# EAGLE board Particle2NodeMCU - Panel (EAGLE 7.3.0)
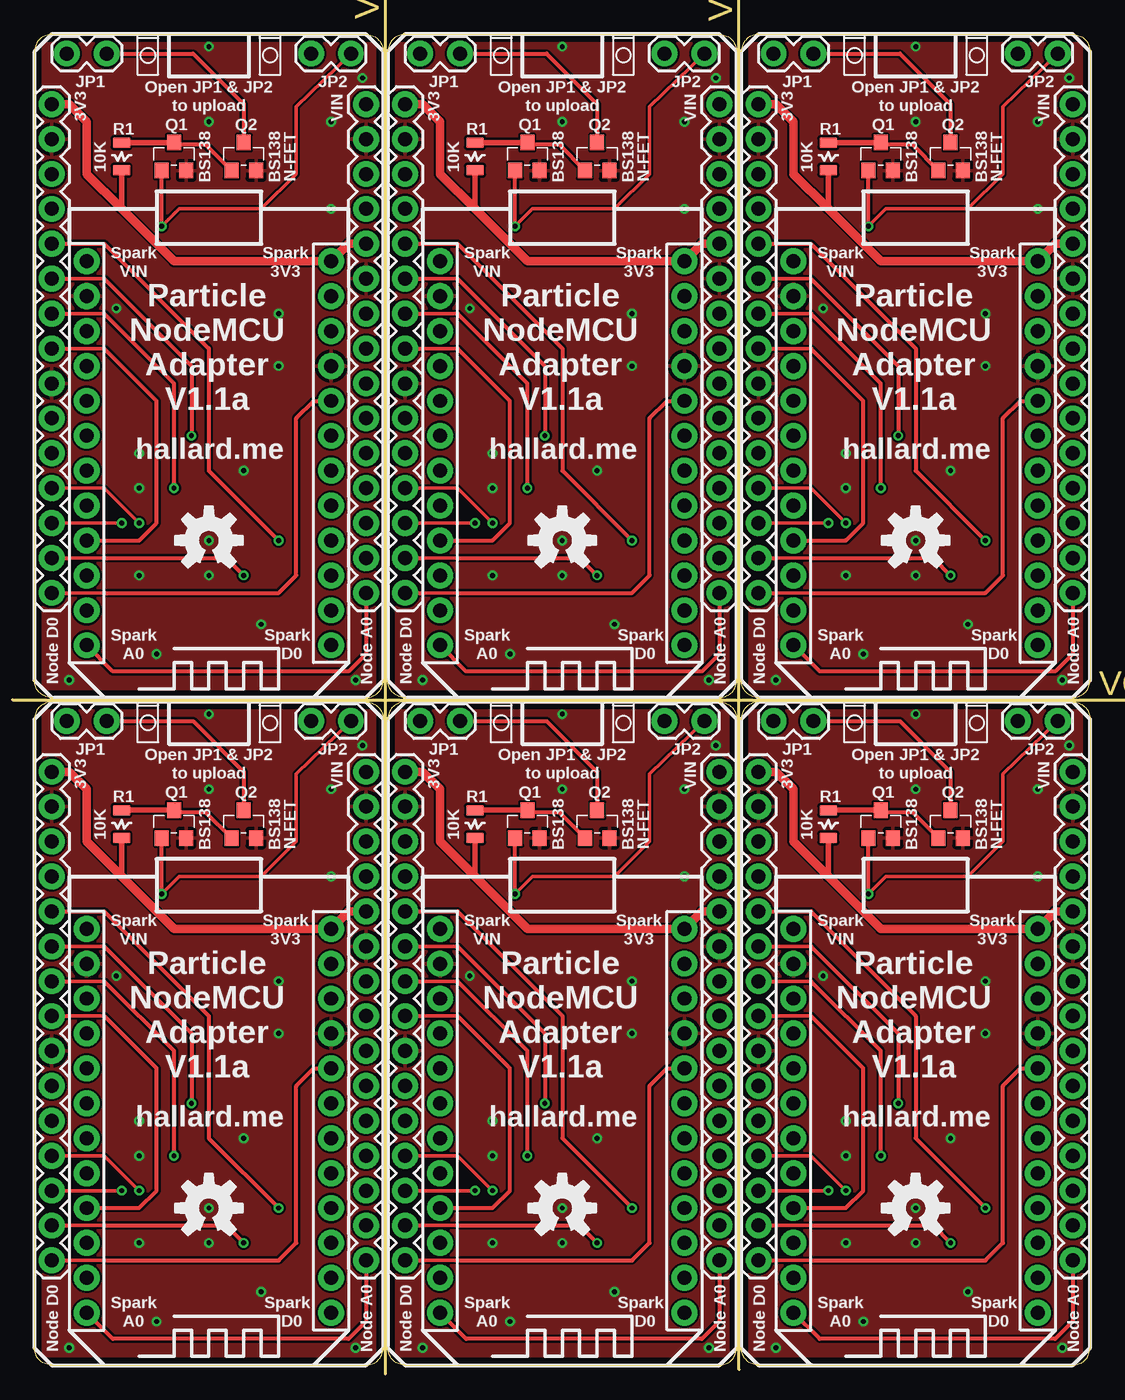
[diagram p0: board, top side]
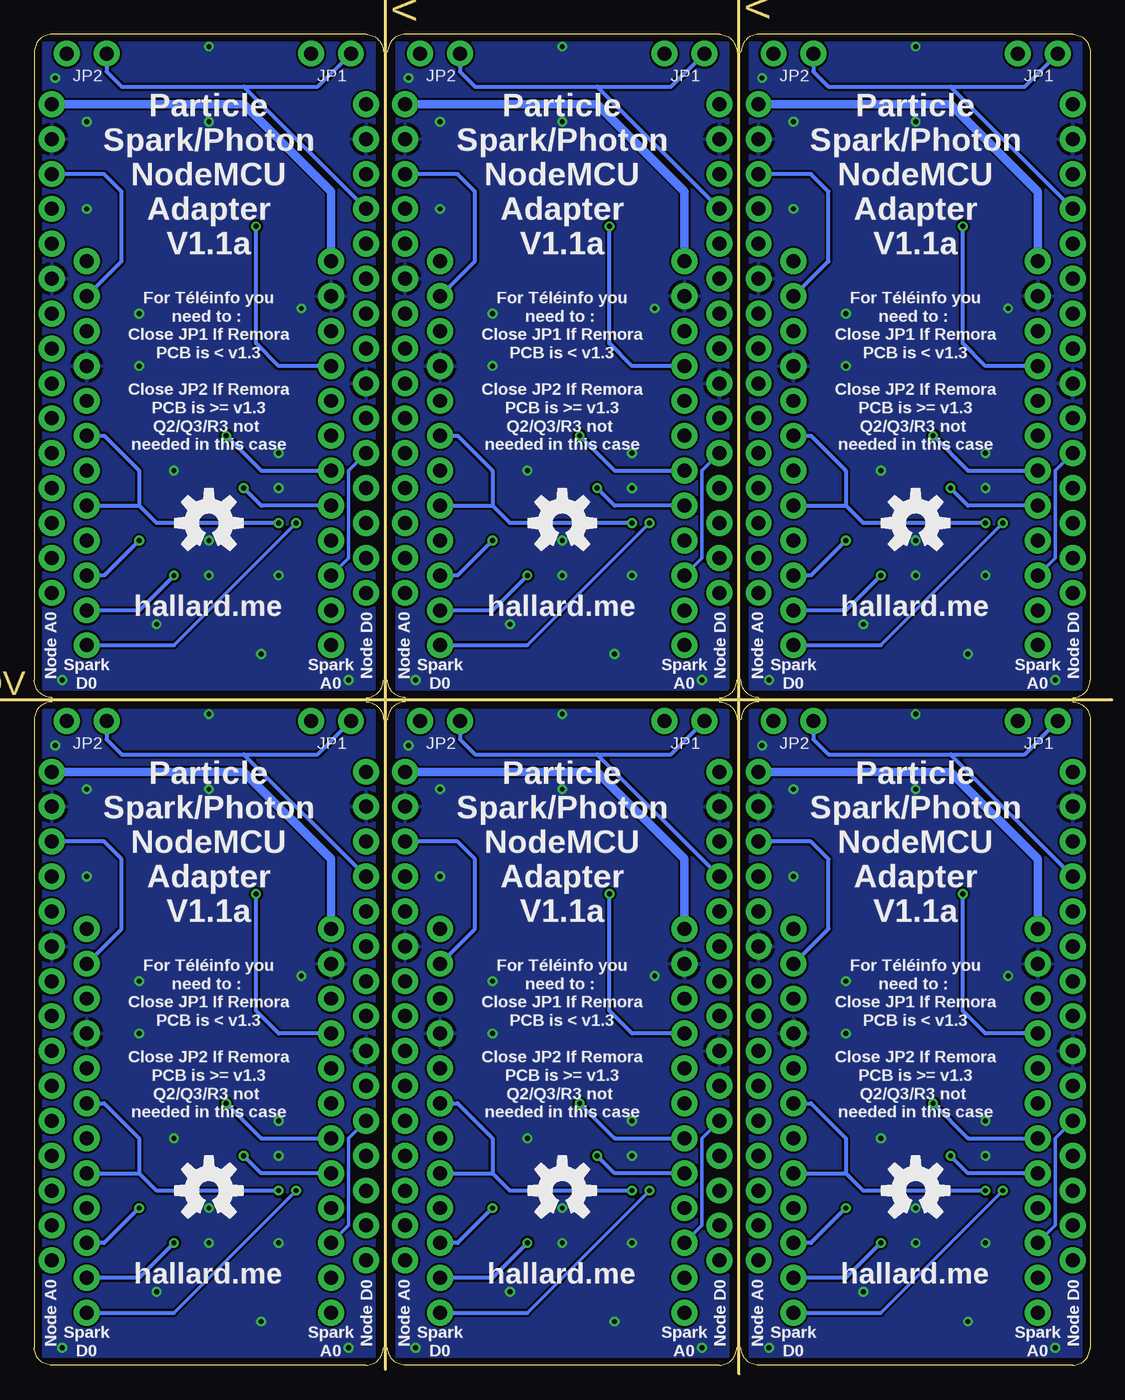
[diagram p1: board, bottom side, seen from below]

Size 76.83 x 96.84 mm. Coordinates in mm from the lower left corner, seen from the top.
Outline: 1.27,0 24.13,0 arc90 25.4,1.27 25.72,1.27 arc90 26.99,0 49.85,0 arc90 51.12,1.27 51.44,1.27 arc90 52.7,0 75.56,0 arc90 76.83,1.27 76.83,46.99 arc90 75.56,48.26 75.56,48.58 arc90 76.83,49.85 76.83,95.57 arc90 75.56,96.84 52.7,96.84 arc90 51.44,95.57 51.12,95.57 arc90 49.85,96.84 26.99,96.84 arc90 25.72,95.57 25.4,95.57 arc90 24.13,96.84 1.27,96.84 arc90 0,95.57 0,49.85 arc90 1.27,48.58 1.27,48.26 arc90 0,46.99 0,1.27 arc90 1.27,0
Outline: 24.13,48.26 arc-90 25.4,46.99 25.72,46.99 arc-90 26.99,48.26 26.99,48.58 arc-90 25.72,49.85 25.4,49.85 arc-90 24.13,48.58 24.13,48.26
Outline: 49.85,48.26 arc-90 51.12,46.99 51.44,46.99 arc-90 52.7,48.26 52.7,48.58 arc-90 51.44,49.85 51.12,49.85 arc-90 49.85,48.58 49.85,48.26
Copper layers (1*16): Top 0.035mm / dielectric 1.5mm / Bottom 0.035mm
Design rules "SeeedStudio_2layer_DRU_no_angle_20140221": minimum track width 6mil, minimum drill 12mil, track to track 6mil, track to pad 6mil, pad to pad 6mil, via to via 6mil, smd to smd 0mil, copper to edge 10mil, drill to drill 10mil, minimum pad ring 10mil, minimum via ring 6mil, stop-mask expansion 2mil, vias tented up to drill 100mil, thermal gap 10mil
Milling: 3 lines

## Footprints (pad centres in the part's own frame; a part is rotated, then mirrored left to right if it is on the bottom)
1X02_LOCK = drill 1.016 pad 1.88: 1 -0.178,0; 2 2.718,0
1X15 = drill 1.016 pad 1.88: 1 0,0; 2 2.54,0; 3 5.08,0; 4 7.62,0; 5 10.16,0; 6 12.7,0; 7 15.24,0; 8 17.78,0; 9 20.32,0; 10 22.86,0; 11 25.4,0; 12 27.94,0; 13 30.48,0; 14 33.02,0; 15 35.56,0
SOT23 = smd 1.016 x 1.143: 1 -0.889,-1.016; 2 0.889,-1.016; 3 0,1.016
0805-RES = smd 0.8 x 1.3: 1 -1,0; 2 1,0
SPARK_CORE = drill 1.016 pad 1.88: 1 -8.89,13.97; 2 -8.89,11.43; 3 -8.89,8.89; 4 -8.89,6.35; 5 -8.89,3.81; 6 -8.89,1.27; 7 -8.89,-1.27; 8 -8.89,-3.81; 9 -8.89,-6.35; 10 -8.89,-8.89; 11 -8.89,-11.43; 12 -8.89,-13.97; 13 8.89,-13.97; 14 8.89,-11.43; 15 8.89,-8.89; 16 8.89,-6.35; 17 8.89,-3.81; 18 8.89,-1.27; 19 8.89,1.27; 20 8.89,3.81; 21 8.89,6.35; 22 8.89,8.89; 23 8.89,11.43; 24 8.89,13.97

## Placement (x,y rotation side)
JP1  [1X02_LOCK]  2.54,46.86 0 top
JP2  [1X02_LOCK]  22.86,46.86 180 top
JP3  [1X15]  1.27,7.62 90 top
JP4  [1X15]  24.13,7.62 90 top
JP5  [1X02_LOCK]  28.26,46.86 0 top
JP6  [1X15]  49.85,7.62 90 top
JP7  [1X15]  26.99,7.62 90 top
JP8  [1X02_LOCK]  48.58,46.86 180 top
JP9  [1X02_LOCK]  53.98,46.86 0 top
JP10  [1X15]  75.56,7.62 90 top
JP11  [1X15]  52.7,7.62 90 top
JP12  [1X02_LOCK]  74.3,46.86 180 top
JP13  [1X02_LOCK]  2.54,95.44 0 top
JP14  [1X15]  24.13,56.2 90 top
JP15  [1X15]  1.27,56.2 90 top
JP16  [1X02_LOCK]  22.86,95.44 180 top
JP17  [1X02_LOCK]  28.26,95.44 0 top
JP18  [1X15]  49.85,56.2 90 top
JP19  [1X15]  26.99,56.2 90 top
JP20  [1X02_LOCK]  48.58,95.44 180 top
JP21  [1X02_LOCK]  53.98,95.44 0 top
JP22  [1X15]  75.56,56.2 90 top
JP23  [1X15]  52.7,56.2 90 top
JP24  [1X02_LOCK]  74.3,95.44 180 top
LOGO1  OSHW-LOGOM  [OSHW-LOGO-M]  12.7,11.43 0 top
LOGO2  OSHW-LOGOM  [OSHW-LOGO-M]  12.7,12.7 0 bottom
LOGO3  OSHW-LOGOM  [OSHW-LOGO-M]  38.42,11.43 0 top
LOGO4  OSHW-LOGOM  [OSHW-LOGO-M]  64.14,11.43 0 top
LOGO5  OSHW-LOGOM  [OSHW-LOGO-M]  12.7,60.01 0 top
LOGO6  OSHW-LOGOM  [OSHW-LOGO-M]  38.42,60.01 0 top
LOGO7  OSHW-LOGOM  [OSHW-LOGO-M]  64.14,60.01 0 top
LOGO8  OSHW-LOGOM  [OSHW-LOGO-M]  38.42,12.7 0 bottom
LOGO9  OSHW-LOGOM  [OSHW-LOGO-M]  64.14,12.7 0 bottom
LOGO10  OSHW-LOGOM  [OSHW-LOGO-M]  12.7,61.28 0 bottom
LOGO11  OSHW-LOGOM  [OSHW-LOGO-M]  38.42,61.28 0 bottom
LOGO12  OSHW-LOGOM  [OSHW-LOGO-M]  64.14,61.28 0 bottom
Q1  MOSFET-N  [SOT23]  10.16,39.37 0 top
Q2  MOSFET-N  [SOT23]  15.24,39.37 0 top
Q3  MOSFET-N  [SOT23]  35.88,39.37 0 top
Q4  MOSFET-N  [SOT23]  40.96,39.37 0 top
Q5  MOSFET-N  [SOT23]  61.59,39.37 0 top
Q6  MOSFET-N  [SOT23]  66.67,39.37 0 top
Q7  MOSFET-N  [SOT23]  10.16,87.95 0 top
Q8  MOSFET-N  [SOT23]  15.24,87.95 0 top
Q9  MOSFET-N  [SOT23]  35.88,87.95 0 top
Q10  MOSFET-N  [SOT23]  40.96,87.95 0 top
Q11  MOSFET-N  [SOT23]  61.59,87.95 0 top
Q12  MOSFET-N  [SOT23]  66.67,87.95 0 top
R1  10K  [0805-RES]  6.35,39.37 270 top
R2  10K  [0805-RES]  32.07,39.37 270 top
R3  10K  [0805-RES]  57.78,39.37 270 top
R4  10K  [0805-RES]  6.35,87.95 270 top
R5  10K  [0805-RES]  32.07,87.95 270 top
R6  10K  [0805-RES]  57.78,87.95 270 top
U$1  SPARK_CORECORE  [SPARK_CORE]  38.42,17.78 0 top
U$2  SPARK_CORECORE  [SPARK_CORE]  12.7,17.78 0 top
U$3  SPARK_CORECORE  [SPARK_CORE]  64.14,17.78 0 top
U$4  SPARK_CORECORE  [SPARK_CORE]  12.7,66.36 0 top
U$5  SPARK_CORECORE  [SPARK_CORE]  38.42,66.36 0 top
U$6  SPARK_CORECORE  [SPARK_CORE]  64.14,66.36 0 top

## Library data of the parts
JP1-JP24 = SparkFun-Connectors
LOGO1-LOGO12 = SparkFun-Aesthetics
Q1-Q12 = Seeed-Discrete
R1-R6 = _c2h
U$1-U$6 = Spark

## Nets
3V1: JP6.11 JP7.15 R2.2 U$1.24
3V2: JP10.11 JP11.15 R3.2 U$3.24
3V3: JP3.15 JP4.11 R1.2 U$2.24
3V3*: U$2.22
3V3*1: U$1.22
3V3*2: U$3.22
3V3*3: U$4.22
3V3*4: U$5.22
3V3*5: U$6.22
3V4: JP14.11 JP15.15 R4.2 U$4.24
3V5: JP18.11 JP19.15 R5.2 U$5.24
3V6: JP22.11 JP23.15 R6.2 U$6.24
A0: JP4.1 U$2.12
A1: JP6.1 U$1.12
A2: JP10.1 U$3.12
A3: JP14.1 U$4.12
A4: JP18.1 U$5.12
A5: JP22.1 U$6.12
GND: JP3.7 JP3.14 JP4.10 JP4.14 Q1.2 Q2.2 U$2.2 U$2.21
GND1: JP6.10 JP6.14 JP7.7 JP7.14 Q3.2 Q4.2 U$1.2 U$1.21
GND2: JP10.10 JP10.14 JP11.7 JP11.14 Q5.2 Q6.2 U$3.2 U$3.21
GND3: JP14.10 JP14.14 JP15.7 JP15.14 Q7.2 Q8.2 U$4.2 U$4.21
GND4: JP18.10 JP18.14 JP19.7 JP19.14 Q9.2 Q10.2 U$5.2 U$5.21
GND5: JP22.10 JP22.14 JP23.7 JP23.14 Q11.2 Q12.2 U$6.2 U$6.21
GPIO0: JP3.4 U$2.17 U$2.19
GPIO1: JP3.13
GPIO2: JP7.1 U$1.20
GPIO3: JP1.1 JP2.2 JP3.12
GPIO4: JP7.13
GPIO5: JP5.1 JP7.12 JP8.2
GPIO6: JP7.11 U$1.15
GPIO7: JP7.4 U$1.17 U$1.19
GPIO8: JP11.1 U$3.20
GPIO9: JP11.13
GPIO10: JP9.1 JP11.12 JP12.2
GPIO11: JP11.11 U$3.15
GPIO12: JP11.4 U$3.17 U$3.19
GPIO13: JP15.1 U$4.20
GPIO14: JP15.13
GPIO15: JP3.11 U$2.15
GPIO16: JP3.1 U$2.20
GPIO17: JP13.1 JP15.12 JP16.2
GPIO18: JP15.11 U$4.15
GPIO19: JP15.4 U$4.17 U$4.19
GPIO20: JP19.1 U$5.20
GPIO21: JP19.13
GPIO22: JP17.1 JP19.12 JP20.2
GPIO23: JP19.11 U$5.15
GPIO24: JP19.4 U$5.17 U$5.19
GPIO25: JP23.1 U$6.20
GPIO26: JP23.13
GPIO27: JP21.1 JP23.12 JP24.2
GPIO28: JP23.11 U$6.15
GPIO29: JP23.4 U$6.17 U$6.19
MISO: JP3.9 U$2.8
MISO1: JP7.9 U$1.8
MISO2: JP11.9 U$3.8
MISO3: JP15.9 U$4.8
MISO4: JP19.9 U$5.8
MISO5: JP23.9 U$6.8
MOSI: JP3.10 U$2.7
MOSI1: JP7.10 U$1.7
MOSI2: JP11.10 U$3.7
MOSI3: JP15.10 U$4.7
MOSI4: JP19.10 U$5.7
MOSI5: JP23.10 U$6.7
N$1: Q3.3 Q4.1 R2.1
N$2: Q5.3 Q6.1 R3.1
N$3: Q1.3 Q2.1 R1.1
N$4: Q7.3 Q8.1 R4.1
N$5: Q9.3 Q10.1 R5.1
N$6: Q11.3 Q12.1 R6.1
RST: JP4.13 U$2.23
RST1: JP6.13 U$1.23
RST2: JP10.13 U$3.23
RST3: JP14.13 U$4.23
RST4: JP18.13 U$5.23
RST5: JP22.13 U$6.23
SCK: JP3.8 U$2.9
SCK1: JP7.8 U$1.9
SCK2: JP11.8 U$3.9
SCK3: JP15.8 U$4.9
SCK4: JP19.8 U$5.9
SCK5: JP23.8 U$6.9
SCL: JP3.2 U$2.14
SCL1: JP7.2 U$1.14
SCL2: JP11.2 U$3.14
SCL3: JP15.2 U$4.14
SCL4: JP19.2 U$5.14
SCL5: JP23.2 U$6.14
SDA: JP3.3 U$2.13
SDA1: JP7.3 U$1.13
SDA2: JP11.3 U$3.13
SDA3: JP15.3 U$4.13
SDA4: JP19.3 U$5.13
SDA5: JP23.3 U$6.13
SS: JP3.5 U$2.10
SS1: JP7.5 U$1.10
SS2: JP11.5 U$3.10
SS3: JP15.5 U$4.10
SS4: JP19.5 U$5.10
SS5: JP23.5 U$6.10
TINFO: JP2.1 Q1.1 U$2.4
TINFO1: JP8.1 Q3.1 U$1.4
TINFO2: JP12.1 Q5.1 U$3.4
TINFO3: JP16.1 Q7.1 U$4.4
TINFO4: JP20.1 Q9.1 U$5.4
TINFO5: JP24.1 Q11.1 U$6.4
TINFO-ADAPTER: JP1.2 Q2.3
TINFO-ADAPTER1: JP5.2 Q4.3
TINFO-ADAPTER2: JP9.2 Q6.3
TINFO-ADAPTER3: JP13.2 Q8.3
TINFO-ADAPTER4: JP17.2 Q10.3
TINFO-ADAPTER5: JP21.2 Q12.3
VIN: JP4.15 U$2.1
VIN1: JP6.15 U$1.1
VIN2: JP10.15 U$3.1
VIN3: JP14.15 U$4.1
VIN4: JP18.15 U$5.1
VIN5: JP22.15 U$6.1

## Tracks (layer width: path | path; a pad name or v marks a point on that pad's centre or on a via)
3V1
  Top 0.406: R2.2 32.07,35.56
  Top 0.61: JP7.15 28.26,43.18 29.53,41.91 29.53,38.1 32.07,35.56 35.88,31.75 U$1.24 48.58,33.02 JP6.11
3V2
  Top 0.406: R3.2 57.78,35.56
  Top 0.61: JP11.15 53.98,43.18 55.24,41.91 55.24,38.1 57.78,35.56 61.59,31.75 U$3.24 74.3,33.02 JP10.11
3V3
  Top 0.406: R1.2 6.35,35.56
  Top 0.61: JP3.15 2.54,43.18 3.81,41.91 3.81,38.1 6.35,35.56 10.16,31.75 U$2.24 22.86,33.02 JP4.11
3V4
  Top 0.406: R4.2 6.35,84.14
  Top 0.61: JP15.15 2.54,91.76 3.81,90.49 3.81,86.68 6.35,84.14 10.16,80.33 U$4.24 22.86,81.6 JP14.11
3V5
  Top 0.406: R5.2 32.07,84.14
  Top 0.61: JP19.15 28.26,91.76 29.53,90.49 29.53,86.68 32.07,84.14 35.88,80.33 U$5.24 48.58,81.6 JP18.11
3V6
  Top 0.406: R6.2 57.78,84.14
  Top 0.61: JP23.15 53.98,91.76 55.24,90.49 55.24,86.68 57.78,84.14 61.59,80.33 U$6.24 74.3,81.6 JP22.11
A0
  Top 0.305: JP4.1 24.13,3.17 22.86,1.91 5.71,1.91 U$2.12
A1
  Top 0.305: JP6.1 49.85,3.17 48.58,1.91 31.43,1.91 U$1.12
A2
  Top 0.305: JP10.1 75.56,3.17 74.3,1.91 57.15,1.91 U$3.12
A3
  Top 0.305: JP14.1 24.13,51.75 22.86,50.48 5.71,50.48 U$4.12
A4
  Top 0.305: JP18.1 49.85,51.75 48.58,50.48 31.43,50.48 U$5.12
A5
  Top 0.305: JP22.1 75.56,51.75 74.3,50.48 57.15,50.48 U$6.12
GND  (via drill 0.36 pad 0.71)
  other vias: 12.7,41.91 21.59,41.91 17.78,27.94 5.97,28.32 8.89,3.17 2.54,1.27 23.37,1.27 23.88,45.09 7.62,8.89 12.7,11.43 12.7,8.89 16.51,5.33 7.62,15.24 7.62,17.78 21.59,35.56 15.24,16.51 17.78,24.13 12.7,47.37
  pour Top: 0.64,47.62 24.77,47.62 24.77,0.64 0.64,0.64
  pour Bottom: 0.64,47.62 24.77,47.62 24.77,0.64 0.64,0.64
GND1  (via drill 0.36 pad 0.71)
  other vias: 38.42,41.91 47.31,41.91 43.5,27.94 31.69,28.32 34.61,3.17 28.26,1.27 49.09,1.27 49.59,45.09 33.34,8.89 38.42,11.43 38.42,8.89 42.23,5.33 33.34,15.24 33.34,17.78 47.31,35.56 40.96,16.51 43.5,24.13 38.42,47.37
  pour Top: 26.35,47.62 50.48,47.62 50.48,0.64 26.35,0.64
  pour Bottom: 26.35,47.62 50.48,47.62 50.48,0.64 26.35,0.64
GND2  (via drill 0.36 pad 0.71)
  other vias: 64.14,41.91 73.03,41.91 69.22,27.94 57.4,28.32 60.33,3.17 53.98,1.27 74.8,1.27 75.31,45.09 59.05,8.89 64.14,11.43 64.14,8.89 67.94,5.33 59.05,15.24 59.05,17.78 73.03,35.56 66.67,16.51 69.22,24.13 64.14,47.37
  pour Top: 52.07,47.62 76.2,47.62 76.2,0.64 52.07,0.64
  pour Bottom: 52.07,47.62 76.2,47.62 76.2,0.64 52.07,0.64
GND3  (via drill 0.36 pad 0.71)
  other vias: 12.7,90.49 21.59,90.49 17.78,76.52 5.97,76.9 8.89,51.75 2.54,49.85 23.37,49.85 23.88,93.66 7.62,57.47 12.7,60.01 12.7,57.47 16.51,53.91 7.62,63.82 7.62,66.36 21.59,84.14 15.24,65.09 17.78,72.71 12.7,95.95
  pour Top: 0.64,96.2 24.77,96.2 24.77,49.21 0.64,49.21
  pour Bottom: 0.64,96.2 24.77,96.2 24.77,49.21 0.64,49.21
GND4  (via drill 0.36 pad 0.71)
  other vias: 38.42,90.49 47.31,90.49 43.5,76.52 31.69,76.9 34.61,51.75 28.26,49.85 49.09,49.85 49.59,93.66 33.34,57.47 38.42,60.01 38.42,57.47 42.23,53.91 33.34,63.82 33.34,66.36 47.31,84.14 40.96,65.09 43.5,72.71 38.42,95.95
  pour Top: 26.35,96.2 50.48,96.2 50.48,49.21 26.35,49.21
  pour Bottom: 26.35,96.2 50.48,96.2 50.48,49.21 26.35,49.21
GND5  (via drill 0.36 pad 0.71)
  other vias: 64.14,90.49 73.03,90.49 69.22,76.52 57.4,76.9 60.33,51.75 53.98,49.85 74.8,49.85 75.31,93.66 59.05,57.47 64.14,60.01 64.14,57.47 67.94,53.91 59.05,63.82 59.05,66.36 73.03,84.14 66.67,65.09 69.22,72.71 64.14,95.95
  pour Top: 52.07,96.2 76.2,96.2 76.2,49.21 52.07,49.21
  pour Bottom: 52.07,96.2 76.2,96.2 76.2,49.21 52.07,49.21
GPIO0  (via drill 0.36 pad 0.71)
  Top 0.254: JP3.4 5.08,15.24 v7.62,12.7
  Bottom 0.305: v7.62,12.7 16.51,12.7 17.78,13.97 | U$2.19 20.32,19.05 17.78,16.51 17.78,13.97 | U$2.17 17.78,13.97
GPIO2
  Top 0.254: 28.26,7.62 30.8,7.62
  Top 0.305: U$1.20 46.04,21.59 44.77,20.32 44.77,8.89 43.5,7.62 30.8,7.62 | JP7.1 28.26,7.62
GPIO3
  Bottom 0.305: JP1.1 4.78,44.45 10.16,44.45 | JP2.2 20.14,45.54 19.05,44.45 10.16,44.45 | JP3.12 10.16,44.45
GPIO5
  Bottom 0.305: JP5.1 30.49,44.45 35.88,44.45 | JP8.2 45.86,45.54 44.77,44.45 35.88,44.45 | JP7.12 35.88,44.45
GPIO6  (via drill 0.36 pad 0.71)
  Top 0.305: JP7.11 30.8,33.02 38.42,25.4 38.42,16.51 v43.5,11.43
  Bottom 0.305: v43.5,11.43 46.04,8.89 U$1.15
GPIO7  (via drill 0.36 pad 0.71)
  Top 0.254: JP7.4 30.8,15.24 v33.34,12.7
  Bottom 0.305: v33.34,12.7 42.23,12.7 43.5,13.97 | U$1.19 46.04,19.05 43.5,16.51 43.5,13.97 | U$1.17 43.5,13.97
GPIO8
  Top 0.254: 53.98,7.62 56.52,7.62
  Top 0.305: U$3.20 71.75,21.59 70.48,20.32 70.48,8.89 69.22,7.62 56.52,7.62 | JP11.1 53.98,7.62
GPIO10
  Bottom 0.305: JP9.1 56.21,44.45 61.59,44.45 | JP12.2 71.58,45.54 70.48,44.45 61.59,44.45 | JP11.12 61.59,44.45
GPIO11  (via drill 0.36 pad 0.71)
  Top 0.305: JP11.11 56.52,33.02 64.14,25.4 64.14,16.51 v69.22,11.43
  Bottom 0.305: v69.22,11.43 71.75,8.89 U$3.15
GPIO12  (via drill 0.36 pad 0.71)
  Top 0.254: JP11.4 56.52,15.24 v59.05,12.7
  Bottom 0.305: v59.05,12.7 67.94,12.7 69.22,13.97 | U$3.19 71.75,19.05 69.22,16.51 69.22,13.97 | U$3.17 69.22,13.97
GPIO13
  Top 0.254: 2.54,56.2 5.08,56.2
  Top 0.305: U$4.20 20.32,70.17 19.05,68.9 19.05,57.47 17.78,56.2 5.08,56.2 | JP15.1 2.54,56.2
GPIO15  (via drill 0.36 pad 0.71)
  Top 0.305: JP3.11 5.08,33.02 12.7,25.4 12.7,16.51 v17.78,11.43
  Bottom 0.305: v17.78,11.43 20.32,8.89 U$2.15
GPIO16
  Top 0.254: 2.54,7.62 5.08,7.62
  Top 0.305: U$2.20 20.32,21.59 19.05,20.32 19.05,8.89 17.78,7.62 5.08,7.62 | JP3.1 2.54,7.62
GPIO17
  Bottom 0.305: JP13.1 4.78,93.03 10.16,93.03 | JP16.2 20.14,94.12 19.05,93.03 10.16,93.03 | JP15.12 10.16,93.03
GPIO18  (via drill 0.36 pad 0.71)
  Top 0.305: JP15.11 5.08,81.6 12.7,73.98 12.7,65.09 v17.78,60.01
  Bottom 0.305: v17.78,60.01 20.32,57.47 U$4.15
GPIO19  (via drill 0.36 pad 0.71)
  Top 0.254: JP15.4 5.08,63.82 v7.62,61.28
  Bottom 0.305: v7.62,61.28 16.51,61.28 17.78,62.55 | U$4.19 20.32,67.63 17.78,65.09 17.78,62.55 | U$4.17 17.78,62.55
GPIO20
  Top 0.254: 28.26,56.2 30.8,56.2
  Top 0.305: U$5.20 46.04,70.17 44.77,68.9 44.77,57.47 43.5,56.2 30.8,56.2 | JP19.1 28.26,56.2
GPIO22
  Bottom 0.305: JP17.1 30.49,93.03 35.88,93.03 | JP20.2 45.86,94.12 44.77,93.03 35.88,93.03 | JP19.12 35.88,93.03
GPIO23  (via drill 0.36 pad 0.71)
  Top 0.305: JP19.11 30.8,81.6 38.42,73.98 38.42,65.09 v43.5,60.01
  Bottom 0.305: v43.5,60.01 46.04,57.47 U$5.15
GPIO24  (via drill 0.36 pad 0.71)
  Top 0.254: JP19.4 30.8,63.82 v33.34,61.28
  Bottom 0.305: v33.34,61.28 42.23,61.28 43.5,62.55 | U$5.19 46.04,67.63 43.5,65.09 43.5,62.55 | U$5.17 43.5,62.55
GPIO25
  Top 0.254: 53.98,56.2 56.52,56.2
  Top 0.305: U$6.20 71.75,70.17 70.48,68.9 70.48,57.47 69.22,56.2 56.52,56.2 | JP23.1 53.98,56.2
GPIO27
  Bottom 0.305: JP21.1 56.21,93.03 61.59,93.03 | JP24.2 71.58,94.12 70.48,93.03 61.59,93.03 | JP23.12 61.59,93.03
GPIO28  (via drill 0.36 pad 0.71)
  Top 0.305: JP23.11 56.52,81.6 64.14,73.98 64.14,65.09 v69.22,60.01
  Bottom 0.305: v69.22,60.01 71.75,57.47 U$6.15
GPIO29  (via drill 0.36 pad 0.71)
  Top 0.254: JP23.4 56.52,63.82 v59.05,61.28
  Bottom 0.305: v59.05,61.28 67.94,61.28 69.22,62.55 | U$6.19 71.75,67.63 69.22,65.09 69.22,62.55 | U$6.17 69.22,62.55
MISO  (via drill 0.36 pad 0.71)
  Top 0.254: 2.54,27.94 5.08,27.94
  Top 0.305: v10.16,15.24 10.16,22.86 5.08,27.94 | JP3.9 2.54,27.94
  Bottom 0.305: U$2.8 8.89,13.97 v10.16,15.24
MISO1  (via drill 0.36 pad 0.71)
  Top 0.254: 28.26,27.94 30.8,27.94
  Top 0.305: v35.88,15.24 35.88,22.86 30.8,27.94 | JP7.9 28.26,27.94
  Bottom 0.305: U$1.8 34.61,13.97 v35.88,15.24
MISO2  (via drill 0.36 pad 0.71)
  Top 0.254: 53.98,27.94 56.52,27.94
  Top 0.305: v61.59,15.24 61.59,22.86 56.52,27.94 | JP11.9 53.98,27.94
  Bottom 0.305: U$3.8 60.33,13.97 v61.59,15.24
MISO3  (via drill 0.36 pad 0.71)
  Top 0.254: 2.54,76.52 5.08,76.52
  Top 0.305: v10.16,63.82 10.16,71.44 5.08,76.52 | JP15.9 2.54,76.52
  Bottom 0.305: U$4.8 8.89,62.55 v10.16,63.82
MISO4  (via drill 0.36 pad 0.71)
  Top 0.254: 28.26,76.52 30.8,76.52
  Top 0.305: v35.88,63.82 35.88,71.44 30.8,76.52 | JP19.9 28.26,76.52
  Bottom 0.305: U$5.8 34.61,62.55 v35.88,63.82
MISO5  (via drill 0.36 pad 0.71)
  Top 0.254: 53.98,76.52 56.52,76.52
  Top 0.305: v61.59,63.82 61.59,71.44 56.52,76.52 | JP23.9 53.98,76.52
  Bottom 0.305: U$6.8 60.33,62.55 v61.59,63.82
MOSI  (via drill 0.36 pad 0.71)
  Top 0.254: 2.54,30.48 5.08,30.48
  Top 0.305: v11.43,19.05 11.43,24.13 5.08,30.48 | JP3.10 2.54,30.48
  Bottom 0.305: v11.43,19.05 8.89,16.51 U$2.7
MOSI1  (via drill 0.36 pad 0.71)
  Top 0.254: 28.26,30.48 30.8,30.48
  Top 0.305: v37.15,19.05 37.15,24.13 30.8,30.48 | JP7.10 28.26,30.48
  Bottom 0.305: v37.15,19.05 34.61,16.51 U$1.7
MOSI2  (via drill 0.36 pad 0.71)
  Top 0.254: 53.98,30.48 56.52,30.48
  Top 0.305: v62.87,19.05 62.87,24.13 56.52,30.48 | JP11.10 53.98,30.48
  Bottom 0.305: v62.87,19.05 60.33,16.51 U$3.7
MOSI3  (via drill 0.36 pad 0.71)
  Top 0.254: 2.54,79.06 5.08,79.06
  Top 0.305: v11.43,67.63 11.43,72.71 5.08,79.06 | JP15.10 2.54,79.06
  Bottom 0.305: v11.43,67.63 8.89,65.09 U$4.7
MOSI4  (via drill 0.36 pad 0.71)
  Top 0.254: 28.26,79.06 30.8,79.06
  Top 0.305: v37.15,67.63 37.15,72.71 30.8,79.06 | JP19.10 28.26,79.06
  Bottom 0.305: v37.15,67.63 34.61,65.09 U$5.7
MOSI5  (via drill 0.36 pad 0.71)
  Top 0.254: 53.98,79.06 56.52,79.06
  Top 0.305: v62.87,67.63 62.87,72.71 56.52,79.06 | JP23.10 53.98,79.06
  Bottom 0.305: v62.87,67.63 60.33,65.09 U$6.7
N$1
  Top 0.305: Q3.3 36.01,40.26 38.16,40.26 Q4.1
  Top 0.406: Q3.3 32.08,40.39 R2.1
N$2
  Top 0.305: Q5.3 61.72,40.26 63.88,40.26 Q6.1
  Top 0.406: Q5.3 57.8,40.39 R3.1
N$3
  Top 0.305: Q1.3 10.29,40.26 12.45,40.26 Q2.1
  Top 0.406: Q1.3 6.37,40.39 R1.1
N$4
  Top 0.305: Q7.3 10.29,88.84 12.45,88.84 Q8.1
  Top 0.406: Q7.3 6.37,88.96 R4.1
N$5
  Top 0.305: Q9.3 36.01,88.84 38.16,88.84 Q10.1
  Top 0.406: Q9.3 32.08,88.96 R5.1
N$6
  Top 0.305: Q11.3 61.72,88.84 63.88,88.84 Q12.1
  Top 0.406: Q11.3 57.8,88.96 R6.1
RST
  Bottom 0.305: U$2.23 19.05,31.75 19.05,36.83 20.32,38.1 JP4.13
RST1
  Bottom 0.305: U$1.23 44.77,31.75 44.77,36.83 46.04,38.1 JP6.13
RST2
  Bottom 0.305: U$3.23 70.48,31.75 70.48,36.83 71.75,38.1 JP10.13
RST3
  Bottom 0.305: U$4.23 19.05,80.33 19.05,85.41 20.32,86.68 JP14.13
RST4
  Bottom 0.305: U$5.23 44.77,80.33 44.77,85.41 46.04,86.68 JP18.13
RST5
  Bottom 0.305: U$6.23 70.48,80.33 70.48,85.41 71.75,86.68 JP22.13
SCK
  Top 0.254: 2.54,25.4 5.08,25.4
  Top 0.305: U$2.9 7.62,11.43 8.89,12.7 8.89,21.59 5.08,25.4 | JP3.8 2.54,25.4
SCK1
  Top 0.254: 28.26,25.4 30.8,25.4
  Top 0.305: U$1.9 33.34,11.43 34.61,12.7 34.61,21.59 30.8,25.4 | JP7.8 28.26,25.4
SCK2
  Top 0.254: 53.98,25.4 56.52,25.4
  Top 0.305: U$3.9 59.05,11.43 60.33,12.7 60.33,21.59 56.52,25.4 | JP11.8 53.98,25.4
SCK3
  Top 0.254: 2.54,73.98 5.08,73.98
  Top 0.305: U$4.9 7.62,60.01 8.89,61.28 8.89,70.17 5.08,73.98 | JP15.8 2.54,73.98
SCK4
  Top 0.254: 28.26,73.98 30.8,73.98
  Top 0.305: U$5.9 33.34,60.01 34.61,61.28 34.61,70.17 30.8,73.98 | JP19.8 28.26,73.98
SCK5
  Top 0.254: 53.98,73.98 56.52,73.98
  Top 0.305: U$6.9 59.05,60.01 60.33,61.28 60.33,70.17 56.52,73.98 | JP23.8 53.98,73.98
SCL  (via drill 0.36 pad 0.71)
  Top 0.254: 2.54,10.16 5.08,10.16
  Top 0.305: JP3.2 2.54,10.16 | 5.08,10.16 13.97,10.16 v15.24,8.89
  Bottom 0.305: v15.24,8.89 17.78,6.35 U$2.14
SCL1  (via drill 0.36 pad 0.71)
  Top 0.254: 28.26,10.16 30.8,10.16
  Top 0.305: JP7.2 28.26,10.16 | 30.8,10.16 39.69,10.16 v40.96,8.89
  Bottom 0.305: v40.96,8.89 43.5,6.35 U$1.14
SCL2  (via drill 0.36 pad 0.71)
  Top 0.254: 53.98,10.16 56.52,10.16
  Top 0.305: JP11.2 53.98,10.16 | 56.52,10.16 65.41,10.16 v66.67,8.89
  Bottom 0.305: v66.67,8.89 69.22,6.35 U$3.14
SCL3  (via drill 0.36 pad 0.71)
  Top 0.254: 2.54,58.74 5.08,58.74
  Top 0.305: JP15.2 2.54,58.74 | 5.08,58.74 13.97,58.74 v15.24,57.47
  Bottom 0.305: v15.24,57.47 17.78,54.93 U$4.14
SCL4  (via drill 0.36 pad 0.71)
  Top 0.254: 28.26,58.74 30.8,58.74
  Top 0.305: JP19.2 28.26,58.74 | 30.8,58.74 39.69,58.74 v40.96,57.47
  Bottom 0.305: v40.96,57.47 43.5,54.93 U$5.14
SCL5  (via drill 0.36 pad 0.71)
  Top 0.254: 53.98,58.74 56.52,58.74
  Top 0.305: JP23.2 53.98,58.74 | 56.52,58.74 65.41,58.74 v66.67,57.47
  Bottom 0.305: v66.67,57.47 69.22,54.93 U$6.14
SDA  (via drill 0.36 pad 0.71)
  Top 0.254: JP3.3 v6.35,12.7
  Bottom 0.254: v6.35,12.7 15.24,3.81
  Bottom 0.305: U$2.13 15.24,3.81
SDA1  (via drill 0.36 pad 0.71)
  Top 0.254: JP7.3 v32.07,12.7
  Bottom 0.254: v32.07,12.7 40.96,3.81
  Bottom 0.305: U$1.13 40.96,3.81
SDA2  (via drill 0.36 pad 0.71)
  Top 0.254: JP11.3 v57.78,12.7
  Bottom 0.254: v57.78,12.7 66.67,3.81
  Bottom 0.305: U$3.13 66.67,3.81
SDA3  (via drill 0.36 pad 0.71)
  Top 0.254: JP15.3 v6.35,61.28
  Bottom 0.254: v6.35,61.28 15.24,52.39
  Bottom 0.305: U$4.13 15.24,52.39
SDA4  (via drill 0.36 pad 0.71)
  Top 0.254: JP19.3 v32.07,61.28
  Bottom 0.254: v32.07,61.28 40.96,52.39
  Bottom 0.305: U$5.13 40.96,52.39
SDA5  (via drill 0.36 pad 0.71)
  Top 0.254: JP23.3 v57.78,61.28
  Bottom 0.254: v57.78,61.28 66.67,52.39
  Bottom 0.305: U$6.13 66.67,52.39
SS
  Bottom 0.254: JP3.5 2.54,16.51 2.54,10.16 U$2.10
SS1
  Bottom 0.254: JP7.5 28.26,16.51 28.26,10.16 U$1.10
SS2
  Bottom 0.254: JP11.5 53.98,16.51 53.98,10.16 U$3.10
SS3
  Bottom 0.254: JP15.5 2.54,65.09 2.54,58.74 U$4.10
SS4
  Bottom 0.254: JP19.5 28.26,65.09 28.26,58.74 U$5.10
SS5
  Bottom 0.254: JP23.5 53.98,65.09 53.98,58.74 U$6.10
TINFO  (via drill 0.36 pad 0.71)
  Top 0.254: v9.27,34.29 10.54,35.56 16.51,35.56 19.05,38.1 19.05,43 JP2.1
  Top 0.305: v9.27,34.29 Q1.1
  Bottom 0.305: U$2.4 7.62,24.13 9.27,25.78 v9.27,34.29
TINFO1  (via drill 0.36 pad 0.71)
  Top 0.254: v34.99,34.29 36.26,35.56 42.23,35.56 44.77,38.1 44.77,43 JP8.1
  Top 0.305: v34.99,34.29 Q3.1
  Bottom 0.305: U$1.4 33.34,24.13 34.99,25.78 v34.99,34.29
TINFO2  (via drill 0.36 pad 0.71)
  Top 0.254: v60.71,34.29 61.98,35.56 67.94,35.56 70.48,38.1 70.48,43 JP12.1
  Top 0.305: v60.71,34.29 Q5.1
  Bottom 0.305: U$3.4 59.05,24.13 60.71,25.78 v60.71,34.29
TINFO3  (via drill 0.36 pad 0.71)
  Top 0.254: v9.27,82.87 10.54,84.14 16.51,84.14 19.05,86.68 19.05,91.58 JP16.1
  Top 0.305: v9.27,82.87 Q7.1
  Bottom 0.305: U$4.4 7.62,72.71 9.27,74.36 v9.27,82.87
TINFO4  (via drill 0.36 pad 0.71)
  Top 0.254: v34.99,82.87 36.26,84.14 42.23,84.14 44.77,86.68 44.77,91.58 JP20.1
  Top 0.305: v34.99,82.87 Q9.1
  Bottom 0.305: U$5.4 33.34,72.71 34.99,74.36 v34.99,82.87
TINFO5  (via drill 0.36 pad 0.71)
  Top 0.254: v60.71,82.87 61.98,84.14 67.94,84.14 70.48,86.68 70.48,91.58 JP24.1
  Top 0.305: v60.71,82.87 Q11.1
  Bottom 0.305: U$6.4 59.05,72.71 60.71,74.36 v60.71,82.87
TINFO-ADAPTER
  Top 0.305: JP1.2 11.56,46.86 15.24,43.18 Q2.3
TINFO-ADAPTER1
  Top 0.305: JP5.2 37.27,46.86 40.96,43.18 Q4.3
TINFO-ADAPTER2
  Top 0.305: JP9.2 62.99,46.86 66.67,43.18 Q6.3
TINFO-ADAPTER3
  Top 0.305: JP13.2 11.56,95.44 15.24,91.76 Q8.3
TINFO-ADAPTER4
  Top 0.305: JP17.2 37.27,95.44 40.96,91.76 Q10.3
TINFO-ADAPTER5
  Top 0.305: JP21.2 62.99,95.44 66.67,91.76 Q12.3
VIN
  Bottom 0.61: U$2.1 3.81,36.83 10.16,43.18 JP4.15
VIN1
  Bottom 0.61: U$1.1 29.53,36.83 35.88,43.18 JP6.15
VIN2
  Bottom 0.61: U$3.1 55.24,36.83 61.59,43.18 JP10.15
VIN3
  Bottom 0.61: U$4.1 3.81,85.41 10.16,91.76 JP14.15
VIN4
  Bottom 0.61: U$5.1 29.53,85.41 35.88,91.76 JP18.15
VIN5
  Bottom 0.61: U$6.1 55.24,85.41 61.59,91.76 JP22.15

## Text on the board
tPlace: 3V3 | Open JP1 & JP2 / to upload | VIN | 3V3 | Open JP1 & JP2 / to upload | VIN | 3V3 | Open JP1 & JP2 / to upload | VIN | BS138 | BS138 | N-FET | BS138 | BS138 | N-FET | BS138 | BS138 | N-FET | Spark / VIN | Spark / 3V3 | Spark / VIN | Spark / 3V3 | Spark / VIN | Spark / 3V3 | Particle / NodeMCU / Adapter / V1.1a | Particle / NodeMCU / Adapter / V1.1a | Particle / NodeMCU / Adapter / V1.1a | hallard.me | hallard.me | hallard.me | Node D0 | Spark / A0 | Spark / D0 | Node A0 | Node D0 | Spark / A0 | Spark / D0 | Node A0 | Node D0 | Spark / A0 | Spark / D0 | Node A0 | 3V3 | Open JP1 & JP2 / to upload | VIN | 3V3 | Open JP1 & JP2 / to upload | VIN | 3V3 | Open JP1 & JP2 / to upload | VIN | BS138 | BS138 | N-FET | BS138 | BS138 | N-FET | BS138 | BS138 | N-FET | Spark / VIN | Spark / 3V3 | Spark / VIN | Spark / 3V3 | Spark / VIN | Spark / 3V3 | Particle / NodeMCU / Adapter / V1.1a | Particle / NodeMCU / Adapter / V1.1a | Particle / NodeMCU / Adapter / V1.1a | hallard.me | hallard.me | hallard.me | Node D0 | Spark / A0 | Spark / D0 | Node A0 | Node D0 | Spark / A0 | Spark / D0 | Node A0 | Node D0 | Spark / A0 | Spark / D0 | Node A0
bPlace: JP1 | JP2 | JP1 | JP2 | JP1 | JP2 | Particle / Spark/Photon / NodeMCU / Adapter / V1.1a | Particle / Spark/Photon / NodeMCU / Adapter / V1.1a | Particle / Spark/Photon / NodeMCU / Adapter / V1.1a | For Téléinfo you / need to : / Close JP1 If Remora / PCB is < v1.3 / / Close JP2 If Remora / PCB is >= v1.3 / Q2/Q3/R3 not / needed in this case | For Téléinfo you / need to : / Close JP1 If Remora / PCB is < v1.3 / / Close JP2 If Remora / PCB is >= v1.3 / Q2/Q3/R3 not / needed in this case | For Téléinfo you / need to : / Close JP1 If Remora / PCB is < v1.3 / / Close JP2 If Remora / PCB is >= v1.3 / Q2/Q3/R3 not / needed in this case | hallard.me | hallard.me | hallard.me | Node D0 | Node A0 | Node D0 | Node A0 | Node D0 | Node A0 | Spark / A0 | Spark / D0 | Spark / A0 | Spark / D0 | Spark / A0 | Spark / D0 | JP1 | JP2 | JP1 | JP2 | JP1 | JP2 | Particle / Spark/Photon / NodeMCU / Adapter / V1.1a | Particle / Spark/Photon / NodeMCU / Adapter / V1.1a | Particle / Spark/Photon / NodeMCU / Adapter / V1.1a | For Téléinfo you / need to : / Close JP1 If Remora / PCB is < v1.3 / / Close JP2 If Remora / PCB is >= v1.3 / Q2/Q3/R3 not / needed in this case | For Téléinfo you / need to : / Close JP1 If Remora / PCB is < v1.3 / / Close JP2 If Remora / PCB is >= v1.3 / Q2/Q3/R3 not / needed in this case | For Téléinfo you / need to : / Close JP1 If Remora / PCB is < v1.3 / / Close JP2 If Remora / PCB is >= v1.3 / Q2/Q3/R3 not / needed in this case | hallard.me | hallard.me | hallard.me | Node D0 | Node A0 | Node D0 | Node A0 | Node D0 | Node A0 | Spark / A0 | Spark / D0 | Spark / A0 | Spark / D0 | Spark / A0 | Spark / D0
Milling: VCut Line | VCut Line | VCut Line
_tNames: JP1 | JP2 | JP1 | JP2 | JP1 | JP2 | R1 | Q1 | Q2 | R1 | Q1 | Q2 | R1 | Q1 | Q2 | JP1 | JP2 | JP1 | JP2 | JP1 | JP2 | R1 | Q1 | Q2 | R1 | Q1 | Q2 | R1 | Q1 | Q2